# EAGLE board Scheda_motori_L298 - backup (EAGLE 6.5.0)

Size 147.3 x 88.57 mm. Coordinates in mm from the lower left corner, seen from the top.
Outline: 0,0 147.3,0 147.3,88.57 0,88.57 0,0
Copper layers (1*16): Top 0.035mm / dielectric 1.5mm / Bottom 0.035mm
Design rules "default": minimum track width 10mil, minimum drill 24mil, track to track 8mil, track to pad 8mil, pad to pad 8mil, via to via 8mil, smd to smd 8mil, copper to edge 40mil, drill to drill 8mil, minimum pad ring 10mil, minimum via ring 8mil, stop-mask expansion 4mil, vias tented up to drill 0mil, thermal gap 10mil

## Footprints (pad centres in the part's own frame; a part is rotated, then mirrored left to right if it is on the bottom)
E2,5-7 = drill 0.813 pad 1.93: + -1.27,0 | drill 0.813 pad 1.93 octagon: - 1.27,0
C050-024X044 = drill 0.813 octagon: 1 -2.54,0; 2 2.54,0
DO41-10 = drill 1.118: A 5.08,0; C -5.08,0
MA04-1 = drill 1.016 long: 1 -3.81,0; 2 -1.27,0; 3 1.27,0; 4 3.81,0
HLMP6 = drill 0.813 long: A -1.27,0; K 1.27,0
EDG-02 = drill 0.813 long: 1 -1.27,-3.81; 2 1.27,-3.81; 3 1.27,3.81; 4 -1.27,3.81
MULTIWATT-15 = drill 1.016 long: 1 -8.89,-7.62; 2 -7.62,-2.54; 3 -6.35,-7.62; 4 -5.08,-2.54; 5 -3.81,-7.62; 6 -2.54,-2.54; 7 -1.27,-7.62; 8 0,-2.54; 9 1.27,-7.62; 10 2.54,-2.54; 11 3.81,-7.62; 12 5.08,-2.54; 13 6.35,-7.62; 14 7.62,-2.54; 15 8.89,-7.62
B3F-10XX = drill 1.016 long: 1 -3.251,2.261; 2 3.251,2.261; 3 -3.251,-2.261; 4 3.251,-2.261
W237-4 = drill 1.194 long: 1 -7.5,-1.27; 2 -2.5,-1.27; 3 2.5,-1.27; 4 7.5,-1.27
FE06 = drill 0.813 long: 1 -6.35,0; 2 -3.81,0; 3 -1.27,0; 4 1.27,0; 5 3.81,0; 6 6.35,0
0207/10 = drill 0.813 octagon: 1 -5.08,0; 2 5.08,0
MA03-1 = drill 1.016 long: 1 -2.54,0; 2 0,0; 3 2.54,0
DIP254P762X508-28 = drill 0.991 square: 1 -7.874,33.02 | drill 0.991: 2 -7.874,30.48; 3 -7.874,27.94; 4 -7.874,25.4; 5 -7.874,22.86; 6 -7.874,20.32; 7 -7.874,17.78; 8 -7.874,15.24; 9 -7.874,12.7; 10 -7.874,10.16; 11 -7.874,7.62; 12 -7.874,5.08; 13 -7.874,2.54; 14 -7.874,0; 15 0,0; 16 0,2.54; 17 0,5.08; 18 0,7.62; 19 0,10.16; 20 0,12.7; 21 0,15.24; 22 0,17.78; 23 0,20.32; 24 0,22.86; 25 0,25.4; 26 0,27.94; 27 0,30.48; 28 0,33.02

## Placement (x,y rotation side)
C1  100u  [E2,5-7]  87.63,72.39 270 top
C2  100n  [C050-024X044]  106.68,64.77 0 top
C3  100n  [C050-024X044]  62.23,72.39 90 top
C4  100n  [C050-024X044]  99.69,64.77 0 top
C5  100n  [C050-024X044]  34.29,63.5 0 top
C6  100n  [C050-024X044]  41.91,63.5 0 top
C8  100u  [E2,5-7]  87.63,64.77 90 top
D1  1N4004  [DO41-10]  93.98,38.1 270 top
D2  1N4004  [DO41-10]  91.44,38.1 90 top
D3  1N4004  [DO41-10]  101.6,34.29 0 top
D4  1N4004  [DO41-10]  109.22,38.1 90 top
D5  1N4004  [DO41-10]  101.6,36.83 0 top
D6  1N4004  [DO41-10]  111.76,38.1 90 top
D7  1N4004  [DO41-10]  101.6,39.37 0 top
D8  1N4004  [DO41-10]  114.3,38.1 90 top
D9  1N4004  [DO41-10]  30.48,38.1 270 top
D10  1N4004  [DO41-10]  27.94,38.1 90 top
D11  1N4004  [DO41-10]  39.37,34.29 0 top
D12  1N4004  [DO41-10]  46.99,38.1 90 top
D13  1N4004  [DO41-10]  39.37,36.83 0 top
D14  1N4004  [DO41-10]  49.53,38.1 90 top
D15  1N4004  [DO41-10]  39.37,39.37 0 top
D16  1N4004  [DO41-10]  52.07,38.1 90 top
EXPANDER_CONNECTOR  [MA04-1]  82.55,48.26 270 top
GREE_LED  HLMP6  [HLMP6]  76.2,24.13 270 top
I2C_ADDRESS  [EDG-02]  87.63,24.13 90 top
I2C_INTERFACE  [MA04-1]  62.23,38.1 270 top
IC3  L298  [MULTIWATT-15]  102.87,59.69 0 top
IC4  L298  [MULTIWATT-15]  36.83,59.69 0 top
MCLR  [B3F-10XX]  54.61,72.39 180 top
MOTOR_OUT1  [W237-4]  104.14,26.67 0 top
MOTOR_OUT2  [W237-4]  40.64,26.67 0 top
ON_LED  HLMP6  [HLMP6]  72.39,24.13 270 top
PROGRAMMING_CONNECTOR  [FE06]  74.93,72.39 0 top
R1  10K  [0207/10]  85.09,35.56 90 top
R2  10K  [0207/10]  87.63,35.56 90 top
R3  680R  [0207/10]  68.58,25.4 90 top
R4  680R  [0207/10]  80.01,35.56 90 top
R5  680R  [0207/10]  82.55,35.56 90 top
R6  10K  [0207/10]  53.34,67.31 180 top
RED_LED  HLMP6  [HLMP6]  80.01,24.13 270 top
SERVO_1  [MA03-1]  60.96,60.96 90 top
SERVO_2  [MA03-1]  55.88,58.42 90 top
SERVO_3  [MA03-1]  50.8,55.88 90 top
SUPPLY  [W237-4]  101.6,72.39 0 top
U$1  PIC16F886-E/SP  [DIP254P762X508-28]  76.2,34.29 0 top

## Library data of the parts
C1 C8 D1-D16 MCLR = ITIS
C2-C6 = rcl
EXPANDER_CONNECTOR I2C_INTERFACE SERVO_1-SERVO_3 = con-lstb; OC_FARNELL: unknown; OC_NEWARK: unknown
GREE_LED ON_LED RED_LED = display-hp; MF: AGILENT TECHNOLOGIES; MPN: HLMP-6500; OC_FARNELL: 1652490; OC_NEWARK: 40K0088
I2C_ADDRESS = special
IC3 IC4 = st-microelectronics
MOTOR_OUT1 MOTOR_OUT2 SUPPLY = con-wago-500; OC_FARNELL: unknown; OC_NEWARK: unknown
PROGRAMMING_CONNECTOR = con-lsta; OC_FARNELL: unknown; OC_NEWARK: unknown
R1-R6 = resistor
U$1 = Microchip_By_element14_Batch_1; MPN: PIC16F886-E/SP; OC_FARNELL: 1579590; OC_NEWARK: 74K8573; PACKAGE: DIP-28; SUPPLIER: Microchip

## Nets
+5V: C1.+ C2.2 C6.2 EXPANDER_CONNECTOR.3 IC3.9 IC4.9 PROGRAMMING_CONNECTOR.2 R1.2 R2.2 R3.2 R6.2 SERVO_1.2 SERVO_2.2 SERVO_3.2 SUPPLY.3 U$1.20
+15V: C4.1 C5.1 C8.+ D1.C D3.C D5.C D7.C D9.C D11.C D13.C D15.C IC3.4 IC4.4 SUPPLY.1
DIP0: I2C_ADDRESS.1 R2.1 U$1.11
DIP1: I2C_ADDRESS.2 R1.1 U$1.16
ENABLE_A: IC3.6 IC3.11 U$1.12
ENABLE_B: IC4.6 IC4.11 U$1.13
EXP0: EXPANDER_CONNECTOR.2 U$1.21
EXP1: EXPANDER_CONNECTOR.1 U$1.22
GND: C1.- C2.1 C3.2 C4.2 C5.2 C6.1 C8.- D2.A D4.A D6.A D8.A D10.A D12.A D14.A D16.A EXPANDER_CONNECTOR.4 GREE_LED.K I2C_ADDRESS.3 I2C_ADDRESS.4 I2C_INTERFACE.1 IC3.1 IC3.8 IC3.15 IC4.1 IC4.8 IC4.15 MCLR.4 ON_LED.K PROGRAMMING_CONNECTOR.3 RED_LED.K SERVO_1.3 SERVO_2.3 SERVO_3.3 SUPPLY.2 SUPPLY.4 U$1.8 U$1.19
GREEN_LED: R4.2 U$1.17
I2C_INT: I2C_INTERFACE.2 U$1.10
ICSPCLK: PROGRAMMING_CONNECTOR.5 U$1.27
ICSPDAT: PROGRAMMING_CONNECTOR.4 U$1.28
INPUT_1: IC3.5 U$1.24
INPUT_2: IC3.7 U$1.23
INPUT_3: IC3.10 U$1.25
INPUT_4: IC3.12 U$1.26
INPUT_5: IC4.5 U$1.9
INPUT_6: IC4.7 U$1.7
INPUT_7: IC4.10 U$1.6
INPUT_8: IC4.12 U$1.5
MCLR: C3.1 MCLR.1 PROGRAMMING_CONNECTOR.1 R6.1 U$1.1
N$3: ON_LED.A R3.1
N$4: GREE_LED.A R4.1
N$5: R5.1 RED_LED.A
OUT_M1: D1.A D2.C IC3.2 MOTOR_OUT1.1
OUT_M2: D3.A D4.C IC3.3 MOTOR_OUT1.2
OUT_M3: D5.A D6.C IC3.13 MOTOR_OUT1.3
OUT_M4: D7.A D8.C IC3.14 MOTOR_OUT1.4
OUT_M5: D9.A D10.C IC4.2 MOTOR_OUT2.1
OUT_M6: D11.A D12.C IC4.3 MOTOR_OUT2.2
OUT_M7: D13.A D14.C IC4.13 MOTOR_OUT2.3
OUT_M8: D15.A D16.C IC4.14 MOTOR_OUT2.4
RED_LED: R5.2 U$1.18
SCL: I2C_INTERFACE.3 U$1.14
SDA: I2C_INTERFACE.4 U$1.15
SERVO_1: SERVO_1.1 U$1.2
SERVO_2: SERVO_2.1 U$1.3
SERVO_3: SERVO_3.1 U$1.4

## Tracks (layer width: path | path; a pad name or v marks a point on that pad's centre or on a via)
+5V  (15 unrouted)
+15V  (13 unrouted)
DIP0  (2 unrouted)
DIP1  (2 unrouted)
ENABLE_A  (2 unrouted)
ENABLE_B  (2 unrouted)
EXP0  (1 unrouted)
EXP1  (1 unrouted)
GND  (36 unrouted)
GREEN_LED  (1 unrouted)
I2C_INT  (1 unrouted)
ICSPCLK  (1 unrouted)
ICSPDAT  (1 unrouted)
INPUT_1  (1 unrouted)
INPUT_2  (1 unrouted)
INPUT_3  (1 unrouted)
INPUT_4  (1 unrouted)
INPUT_5  (1 unrouted)
INPUT_6  (1 unrouted)
INPUT_7  (1 unrouted)
INPUT_8  (1 unrouted)
MCLR  (4 unrouted)
N$3  (1 unrouted)
N$4  (1 unrouted)
N$5  (1 unrouted)
OUT_M1  (3 unrouted)
OUT_M2  (3 unrouted)
OUT_M3  (3 unrouted)
OUT_M4  (3 unrouted)
OUT_M5  (3 unrouted)
OUT_M6  (3 unrouted)
OUT_M7  (3 unrouted)
OUT_M8  (3 unrouted)
RED_LED  (1 unrouted)
SCL  (1 unrouted)
SDA  (1 unrouted)
SERVO_1  (1 unrouted)
SERVO_2  (1 unrouted)
SERVO_3  (1 unrouted)